# Altium PCB CZ100_V1.0.PcbDoc
Units mm, origin at the board's own origin, x right, y up, seen from the top; angles counter-clockwise.
Board outline 41.8 x 54 mm, 2 copper layers (Top Layer, Bottom Layer); 35 components, 22 nets, 86 pads, 5 vias.
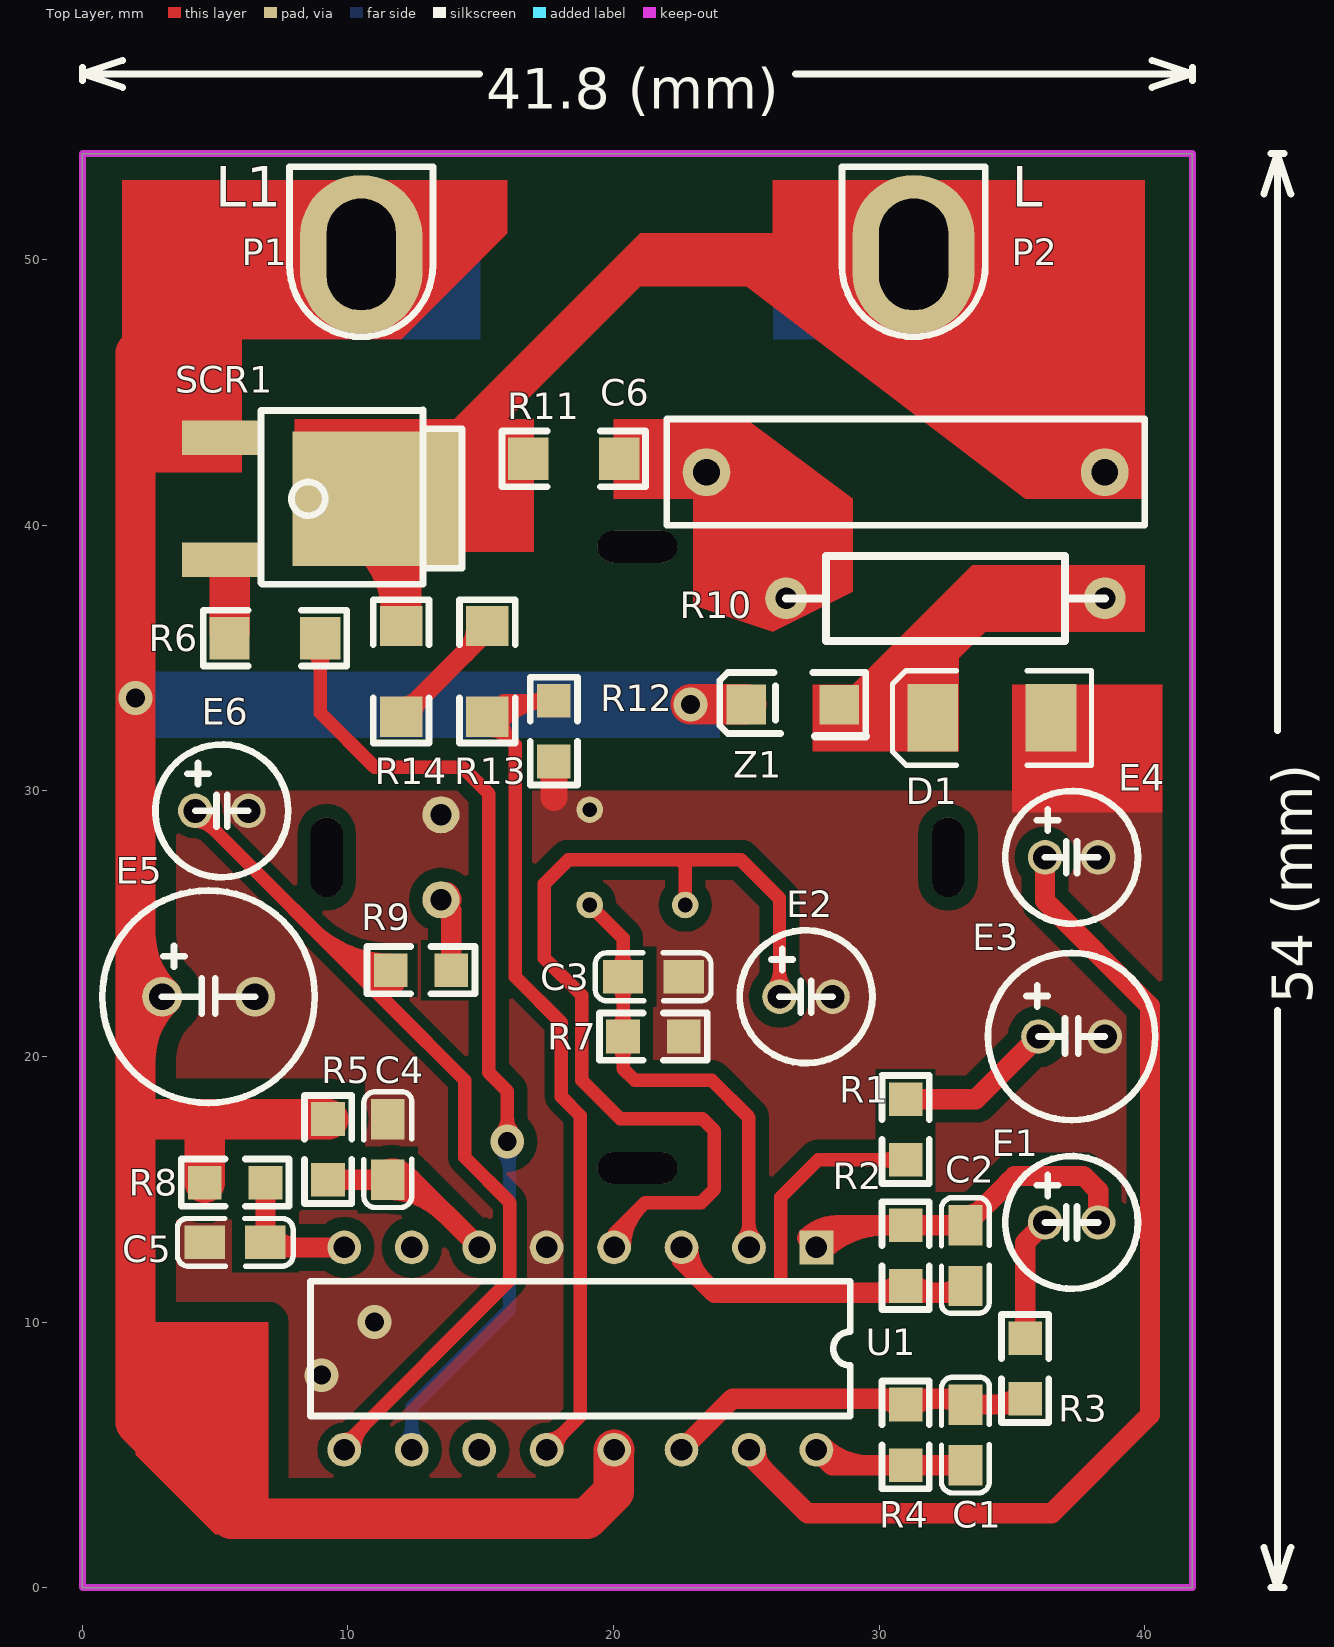
[diagram p0: Top Layer view]
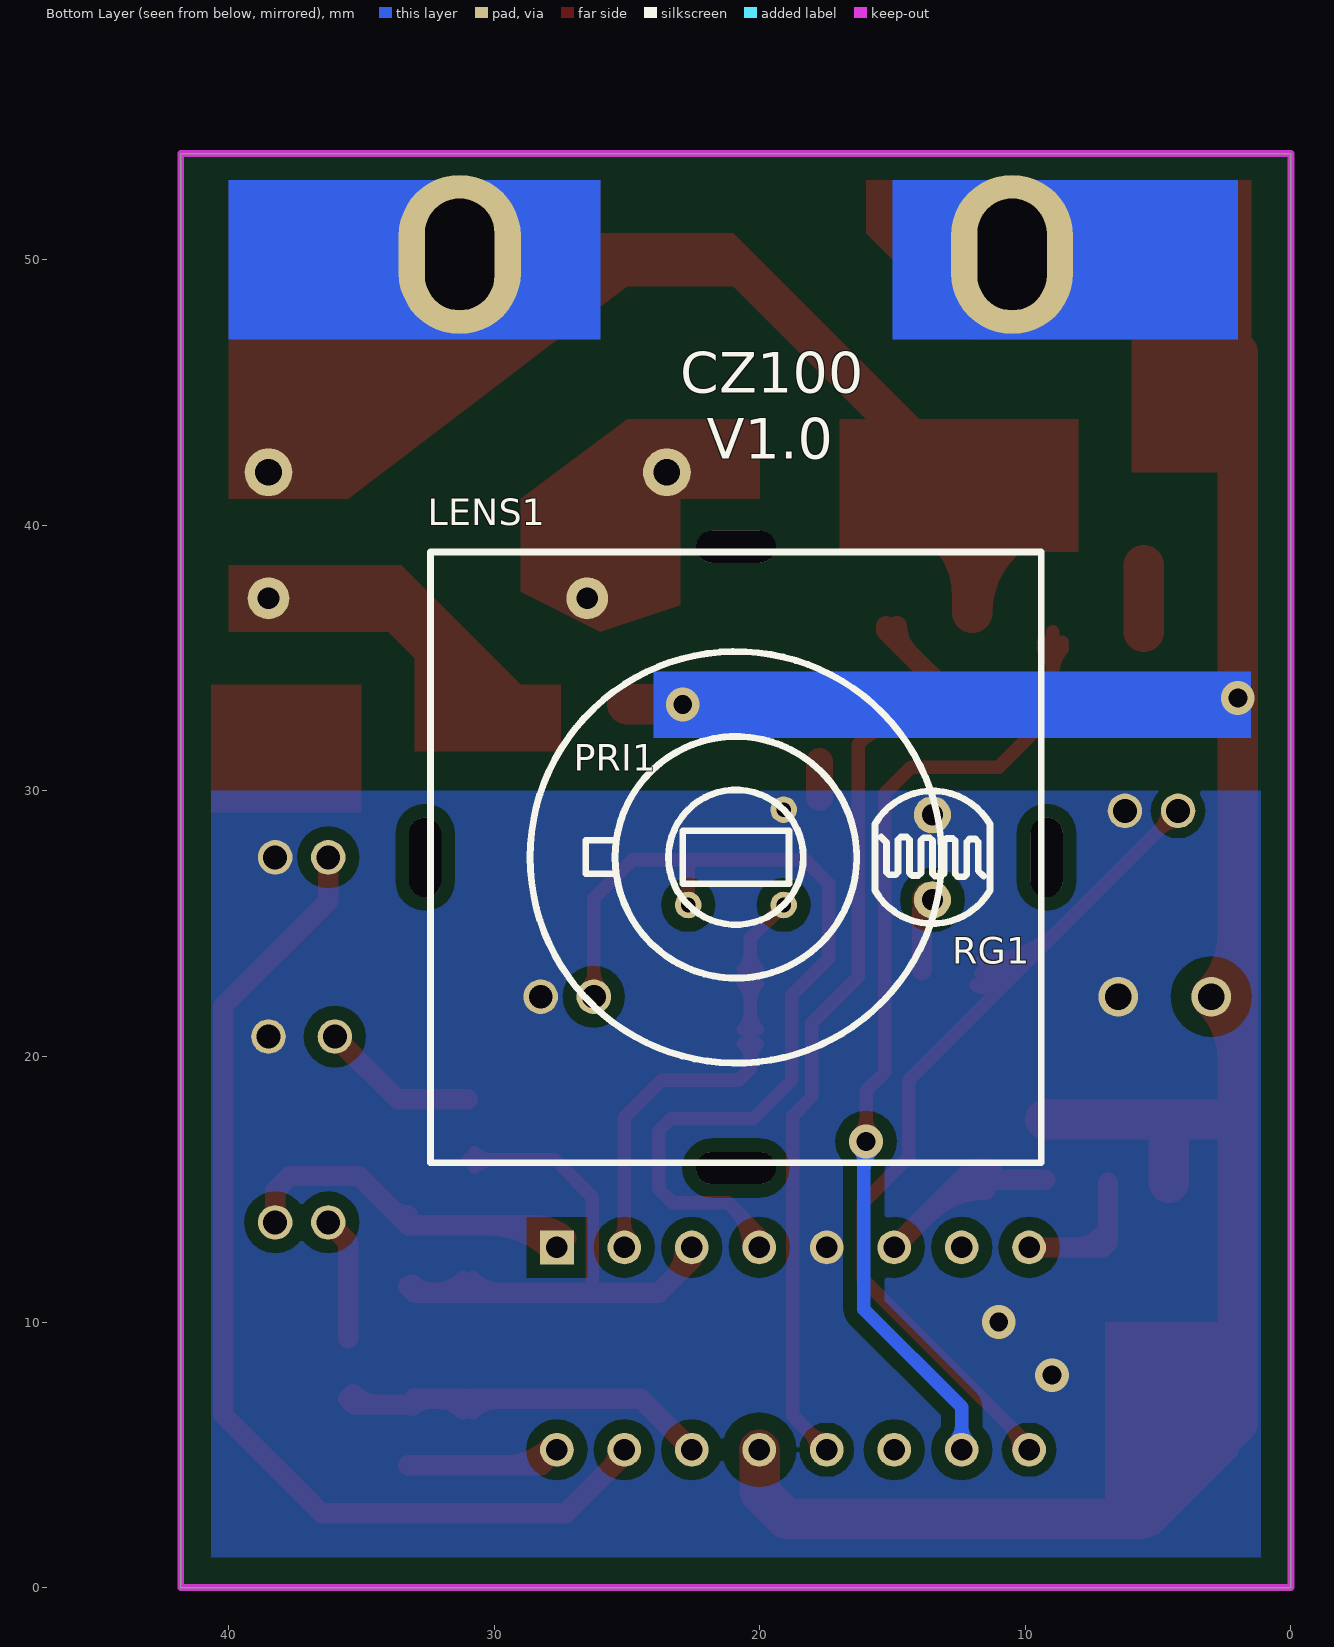
[diagram p1: Bottom Layer view, seen from below]

## Layer stack, top to bottom
Top Layer: signal copper 0.0356
Dielectric: dielectric 0.32, FR-4, Dk 4.8
Bottom Layer: signal copper 0.0356

## Board outline
0,0 0,54 41.8,54 41.8,0

## Design rules (kind name [scope] priority, off if disabled: settings)
Clearance "InPolygon to Keep-Out Layer" [InPolygon vs OnLayer('Keep-Out Layer')] p1: gap=1
Clearance "GND to +5V" [InNet('GND') vs InNet('+5V')] p2: gap=0.762
Clearance "NetE6_1 to GND" [InNet('NetE6_1') vs InNet('GND')] p3: gap=0.381
Clearance "NetR12_1 to GND" [InNet('NetR12_1') vs InNet('GND')] p4: gap=0.381
Clearance "GND to All" [InNet('GND')] p5: gap=0.508
Clearance [All] p6: gap=0.254
HoleSize [All] p1: absolutevalues=TRUE maxlimit=25.4 minlimit=0.025 maxpercent=80.000 minpercent=20.000
MinimumSolderMaskSliver [All] p1: minsoldermaskwidth=0
PlaneConnect [All] p1: planeconnectstyle=Direct reliefexpansion=0.508 reliefentries=4 reliefconductorwidth=0.254 reliefairgap=0.254
PolygonConnect [All] p1: connectstyle=Direct reliefconductorwidth=0.254 reliefentries=4 polygonreliefangle="90 Angle"
RoutingVias [All] p1: holewidth=0.711 width=1.27 viastyle="Through Hole" minholewidth=0.711 minwidth=1.27 maxholewidth=0.711 maxwidth=1.27
SilkToSilkClearance [All] p1: silktosilkclearance=0
SilkscreenOverComponentPads [All] p1: minsilkscreentomaskgap=0
SolderMaskExpansion [All] p1: expansion=0.102
Width [All] p1: maxlimit=25.4 minlimit=0.254 preferedwidth=0.254
23 further rules are at their usual default settings.

## Components (designator, comment, footprint, x,y, rotation, side; value= is the part's Value field where it differs from the comment)
C1 "100nF" 0805_C1 33.25,5.75 r90 top
C2 "270nF" 0805_C1 33.25,12.5 r270 top
C3 "220pF" 0805_C1 21.5,23 r0 top
C4 "220pF" 0805_C1 11.5,16.5 r90 top
C5 "10nF" 0805_C1 5.75,13 r180 top
C6 "CBB22224J400V" CBB22224J400V 31,42 r180 top
D1 "M7" DO-214AC(SMA) 34.25,32.75 r0 top
E1 "47uF/16V" CS_47uF/25V 37.25,13.75 r0 top
E2 "100uF/16V" CS_100uF/16V 27.25,22.25 r0 top
E3 "220uF/16V" CS_220uF/16V 37.25,20.75 r0 top
E4 "22uF/16V" CS_47uF/25V 37.25,27.5 r0 top
E5 "470uF/16V" CS_470uF/16V 4.75,22.25 r0 top
E6 "1uF/50V" CS_47uF/25V 5.25,29.25 r0 top
LENS1 "Fresnel lens" "Fresnel lens" 20.9,27.5 r180 bottom locked
P1 "L1" CP3M*8.8 10.5,53.5 r180 top locked
P2 "L" CP3M*8.8 31.3,53.5 r180 top locked
PRI1 "KP500BP" D203S 20.9,27.5 r315 bottom locked
R1 "2.2K" 0805_R 31,17.25 r270 top
R2 "220K" 0805_R 31,12.5 r90 top
R3 "6.2K" 0805_R 35.5,8.25 r90 top
R4 "430K" 0805_R 31,5.75 r270 top
R5 "510K" 0805_R 9.25,16.5 r90 top
R6 "330R" 1206_R 7.25,35.75 r180 top
R7 "47K" 0805_R 21.5,20.75 r180 top
R8 "30K" 0805_R 5.75,15.25 r180 top
R9 "220K" 0805_R 12.75,23.25 r180 top
R10 "47R/0.5W" RT50 32.5,37.25 r180 top
R11 "1M" 1206_R 18.5,42.5 r0 top
R12 "1M" 0805_R 17.75,32.25 r270 top
R13 "430K" 1206_R 15.25,34.5 r270 top
R14 "430K" 1206_R 12,34.5 r90 top
RG1 "GL5539" R5537 13.5,27.5 r270 bottom locked
SCR1 "BT136" TO-252 8.5,41 r270 top
U1 "CS9803GP" DIP-16 18.75,9 r270 top
Z1 "ZMM5V6" LL-34 26.75,33.25 r0 top

## Footprints (in the part's own frame and the unit in brackets; to place one, negate y for a bottom-side part, rotate by r counter-clockwise, add the part's x,y. Pads: shape width x height; smd on the part's side, far side on the other; paste and mask are expansions set on the pad)
0805_C1 [mil]
  rect 60x50 smd: 1(-45,0) 2(45,0)
  silkscreen extent -86,-35 85,35
0805_R [mil] "SMD Resistor"
  rect 50x50 smd: 1(-45,0) 2(45,0)
  silkscreen extent -80,-35 80,35
1206_R [mm] "SMD Resistor"
  rect 1.52x1.6 smd: 1(-1.71,0) 2(1.71,0)
  silkscreen extent -2.7,-1.05 2.7,1.05
CBB22224J400V [mm]
  round 1.8 hole 1: 1(-7.5,0) 2(7.5,0)
  silkscreen extent -9,-2 9,2
CP3M*8.8 [mm]
  oval 4.6x6 hole 2.6 slot 4.2 at 90 deg: 1(0,3.3)
  silkscreen extent -2.7,0 2.7,6.4
CS_47uF/25V [mm] "PTH  Electrolytic  Capacitor"
  round 1.3 hole 0.9: 1(-1,0) 2(1,0)
  silkscreen extent -2.5,-2.5 2.5,2.5
CS_100uF/16V [mm] "PTH  Electrolytic  Capacitor"
  round 1.3 hole 0.9: 1(-1,0) 2(1,0)
  silkscreen extent -2.5,-2.5 2.5,2.5
CS_220uF/16V [mm] "PTH  Electrolytic  Capacitor"
  round 1.3 hole 0.9: 1(-1.25,0) 2(1.25,0)
  silkscreen extent -3.15,-3.15 3.15,3.15
CS_470uF/16V [mm] "PTH  Electrolytic  Capacitor"
  round 1.5 hole 1: 1(-1.75,0) 2(1.75,0)
  silkscreen extent -4,-4 4,4
D203S [mm] "D203S, KP500BP"
  round 1 hole 0.55: 1(2.54,0) 2(0,2.54) 3(-2.54,0)
  silkscreen extent -4.55,-4.55 4.55,4.55
DIP-16 [mil]
  rect 50x50 hole 32: 1(-150,350)
  round 50 hole 32: 2(-150,250) 3(-150,150) 4(-150,50) 5(-150,-50) 6(-150,-150) 7(-150,-250) 8(-150,-350) 9(150,-350) 10(150,-250) 11(150,-150) 12(150,-50) 13(150,50) 14(150,150) 15(150,250) 16(150,350)
  silkscreen extent -100,-400 100,400
DO-214AC(SMA) [mil] "SMD Diode"
  rect 75x100 smd: A(87.5,0) K(-87.5,0)
  silkscreen extent -147,-70 148,70
"Fresnel lens" [mm]
  oval 1.2x3 hole 1.2 slot 3 at 90 deg unplated: 0(-11.7,0) 0(11.7,0)
  oval 3x1.2 hole 1.2 slot 3 at 0 deg unplated: 0(0,-11.7) 0(0,11.7)
  silkscreen extent -11.5,-11.5 11.5,11.5
LL-34 [mm] "SMD Diode"
  rect 1.5x1.5 smd: A(1.75,-0.008) K(-1.75,0.008)
  silkscreen extent -2.75,-1.19 2.75,1.21
R5537 [mm] "PTH Light dependent resistors"
  round 1.4 hole 0.8: 1(-1.6,0) 2(1.6,0)
  silkscreen extent -2.5,-2.17 2.5,2.17
RT50 [mil]
  round 62 hole 32: 1(-236.22,0) 2(236.22,0)
  silkscreen extent -236,-63 236,63
TO-252 [mm] "SMD IC"
  rect 1.3x3 smd: 1(-2.3,-3.245) 3(2.3,-3.245)
  rect 5.08x6.35 smd: 2(0,2.592)
  silkscreen extent -3.35,-1.78 3.22,5.79

## Part data
C1 C2 C3 C4 C5 C6: library part Cap1
D1: library part Diode-A, "SS14,SS24,SS34,M7"
E1 E2 E3 E4 E5 E6: library part "Cap Pol1"
P1 P2: library part "Header 1", "Header, 1-Pin"
PRI1: library part D203S, "D203S, KP500BP"
R1 R2 R3 R4 R5 R6 R7 R8 R9 R10 R11 R12 R13 R14: library part Res1
SCR1: library part TRIAC
Z1: library part Diode-B

## Via types
v1: diameter 1.27, hole 0.711, Top Layer to Bottom Layer, 5 vias

## Nets (pads, with @x,y where several pads share a name; then routed paths per layer and width w, separated by ;. In a path a pad name is that pad's centre, name@x,y a point inside that pad or via, vN(x,y) a via of type N, cw(c..) or ccw(c..) an arc to the next point about the centre after c; other vN are vias at no path point)
+3.1V_VREF: E2.1 PRI1.1 U1.4 | length 51.9
  Top Layer w0.508: U1.4 20.02,13.32 21.2,14.5 23.3,14.5 23.8,15 23.8,17.2 23.35,17.65 20.25,17.65 18.8,19.1 18.8,22.3 17.4,23.7 17.4,26.5 18.3,27.4 22.5,27.4 ; PRI1.1 22.696,27.204 22.5,27.4 ; E2.1 26.25,23.9 26.25,25.95 24.8,27.4 22.5,27.4 ; U1.4@19.893,12.81 cw(c20.818,12.81) 20.164,13.464 ; U1.4@19.893,12.81 cw(c20.818,12.81) 20.164,13.464 ; U1.4@19.893,12.81 cw(c20.818,12.81) 20.164,13.464 ; U1.4@19.893,12.81 cw(c20.818,12.81) 20.164,13.464 ; U1.4@20.401,12.81 cw(c22.552,12.81) 21.031,14.331 ; U1.4@20.401,12.81 cw(c22.552,12.81) 21.031,14.331 ; U1.4@20.401,12.81 cw(c22.552,12.81) 21.031,14.331 ; U1.4@20.401,12.81 cw(c22.552,12.81) 21.031,14.331 ; E2.1@25.97,22.53 ccw(c25.294,23.206) 26.25,23.206 ; E2.1@25.97,22.53 ccw(c25.294,23.206) 26.25,23.206 ; E2.1@25.97,22.53 ccw(c25.294,23.206) 26.25,23.206 ; E2.1@25.97,22.53 ccw(c25.294,23.206) 26.25,23.206 ; 26.25,23.206 ccw(c27.206,23.206) E2.1@26.53,22.53 ; 26.25,23.206 ccw(c27.206,23.206) E2.1@26.53,22.53 ; 26.25,23.206 ccw(c27.206,23.206) E2.1@26.53,22.53 ; 26.25,23.206 ccw(c27.206,23.206) E2.1@26.53,22.53
+5V: E5.1 P1.1 R5.2 R8.2 SCR1.1 U1.13 Z1.K | length 116.9
  Top Layer w1.524: 2.743,17.643 4.5,17.643 ; R8.2 4.607,17.536 4.5,17.643 ; R5.2 4.5,17.643 ; P1.1 5.7,50.2 2,46.5 2,6.2 5.6,2.6 19,2.6 20,3.6 20,5.17 U1.13 ; v1(22.9,33.258) Z1.K ; 2,19.865 cw(c5.385,19.865) E5.1@2.992,22.258 ; 2,19.865 cw(c5.385,19.865) E5.1@2.992,22.258 ; 2,19.865 cw(c5.385,19.865) E5.1@2.992,22.258 ; 2,19.865 cw(c5.385,19.865) E5.1@2.992,22.258 ; 2,24.635 ccw(c5.385,24.635) E5.1@2.992,22.242 ; 2,24.635 ccw(c5.385,24.635) E5.1@2.992,22.242 ; 2,24.635 ccw(c5.385,24.635) E5.1@2.992,22.242 ; 2,24.635 ccw(c5.385,24.635) E5.1@2.992,22.242 ; P1.1@8.477,50.2 cw(c8.477,48.177) P1.1@9.907,49.607 ; P1.1@8.477,50.2 ccw(c8.477,52.223) P1.1@9.907,50.793 ; P1.1@8.477,50.2 cw(c8.477,48.177) P1.1@9.907,49.607 ; P1.1@8.477,50.2 ccw(c8.477,52.223) P1.1@9.907,50.793 ; P1.1@8.477,50.2 cw(c8.477,48.177) P1.1@9.907,49.607 ; P1.1@8.477,50.2 ccw(c8.477,52.223) P1.1@9.907,50.793 ; P1.1@8.477,50.2 cw(c8.477,48.177) P1.1@9.907,49.607 ; P1.1@8.477,50.2 ccw(c8.477,52.223) P1.1@9.907,50.793
  other v1: 2,33.5
GND: C3.2 C4.2 C5.2 D1.A E2.2 E3.2 E4.2 E5.2 E6.2 PRI1.3 R7.1 R12.2 RG1.1 U1.5 | length 1.4
  Top Layer w1.016: 17.75,29.75 R12.2
  other v1: 9,8 11,10
NetC1_1: C1.1 R4.2 U1.16 | length 14
  Top Layer w0.762: U1.16 28.223,4.607 R4.2 C1.1 ; U1.16@27.82,5.37 ccw(c29.661,7.211) 29.661,4.607 ; U1.16@27.82,5.37 ccw(c29.661,7.211) 29.661,4.607 ; U1.16@27.82,5.37 ccw(c29.661,7.211) 29.661,4.607 ; U1.16@27.82,5.37 ccw(c29.661,7.211) 29.661,4.607
NetC1_2: C1.2 R3.1 R4.1 U1.14 | length 29.4
  Top Layer w0.762: U1.14 24.477,7.107 R4.1@31,7.107 ; R4.1 R4.1@31.107,7 ; R4.1@31.214,7.107 33.036,7.107 C1.2 35.286,6.893 R3.1 ; 29.87,7.107 cw(c29.87,5.763) R4.1@30.82,6.713 ; 29.87,7.107 cw(c29.87,5.763) R4.1@30.82,6.713 ; 29.87,7.107 cw(c29.87,5.763) R4.1@30.82,6.713 ; 29.87,7.107 cw(c29.87,5.763) R4.1@30.82,6.713 ; R4.1@31.18,6.713 cw(c32.13,5.763) 32.13,7.107 ; R4.1@31.18,6.713 cw(c32.13,5.763) 32.13,7.107 ; R4.1@31.18,6.713 cw(c32.13,5.763) 32.13,7.107 ; R4.1@31.18,6.713 cw(c32.13,5.763) 32.13,7.107 ; 32.427,7.107 cw(c32.427,6.197) C1.2@33.07,6.84 ; 32.427,7.107 cw(c32.427,6.197) C1.2@33.07,6.84 ; 32.427,7.107 cw(c32.427,6.197) C1.2@33.07,6.84 ; 32.427,7.107 cw(c32.427,6.197) C1.2@33.07,6.84 ; 34.37,6.893 ccw(c34.37,8.237) R3.1@35.32,7.287 ; 34.37,6.893 ccw(c34.37,8.237) R3.1@35.32,7.287 ; 34.37,6.893 ccw(c34.37,8.237) R3.1@35.32,7.287 ; 34.37,6.893 ccw(c34.37,8.237) R3.1@35.32,7.287
NetC2_1: C2.1 E1.2 R2.2 U1.1 | length 32
  Top Layer w0.762: U1.1 28.473,13.643 R2.2 C2.1 34.8,15.193 34.8,15.2 35.1,15.5 37.7,15.5 38.25,14.95 E1.2 ; U1.1@27.281,13.169 cw(c28.425,12.025) 28.425,13.643 ; U1.1@27.281,13.169 cw(c28.425,12.025) 28.425,13.643 ; U1.1@27.281,13.169 cw(c28.425,12.025) 28.425,13.643 ; U1.1@27.281,13.169 cw(c28.425,12.025) 28.425,13.643 ; U1.1@27.82,12.63 cw(c30.264,10.186) 30.264,13.643 ; U1.1@27.82,12.63 cw(c30.264,10.186) 30.264,13.643 ; U1.1@27.82,12.63 cw(c30.264,10.186) 30.264,13.643 ; U1.1@27.82,12.63 cw(c30.264,10.186) 30.264,13.643 ; C2.1@33.25,14.024 ccw(c33.25,14.944) 33.9,14.293 ; C2.1@33.25,14.024 ccw(c33.25,14.944) 33.9,14.293 ; C2.1@33.25,14.024 ccw(c33.25,14.944) 33.9,14.293 ; C2.1@33.25,14.024 ccw(c33.25,14.944) 33.9,14.293
NetC2_2: C2.2 R1.2 R2.1 U1.3 | length 44.6
  Top Layer w0.508: 26.3,11.1 26.3,14.7 27.707,16.107 R1.2 ; 30.08,16.107 cw(c30.08,15.187) R1.2@30.731,15.838 ; 30.08,16.107 ccw(c30.08,17.027) R1.2@30.731,16.376 ; 30.08,16.107 cw(c30.08,15.187) R1.2@30.731,15.838 ; 30.08,16.107 ccw(c30.08,17.027) R1.2@30.731,16.376 ; 30.08,16.107 cw(c30.08,15.187) R1.2@30.731,15.838 ; 30.08,16.107 ccw(c30.08,17.027) R1.2@30.731,16.376 ; 30.08,16.107 cw(c30.08,15.187) R1.2@30.731,15.838 ; 30.08,16.107 ccw(c30.08,17.027) R1.2@30.731,16.376
  Top Layer w0.762: U1.3 22.56,12.34 23.8,11.1 26.3,11.1 32.993,11.1 C2.2 ; U1.3@22.814,12.81 ccw(c24.562,12.81) 23.326,11.574 ; U1.3@22.814,12.81 ccw(c24.562,12.81) 23.326,11.574 ; U1.3@22.814,12.81 ccw(c24.562,12.81) 23.326,11.574 ; U1.3@22.814,12.81 ccw(c24.562,12.81) 23.326,11.574 ; 29.766,11.1 ccw(c29.766,12.591) R2.1@30.82,11.537 ; 29.766,11.1 ccw(c29.766,12.591) R2.1@30.82,11.537 ; 29.766,11.1 ccw(c29.766,12.591) R2.1@30.82,11.537 ; 29.766,11.1 ccw(c29.766,12.591) R2.1@30.82,11.537 ; R2.1@31.18,11.537 ccw(c32.234,12.591) 32.234,11.1 ; R2.1@31.18,11.537 ccw(c32.234,12.591) 32.234,11.1 ; R2.1@31.18,11.537 ccw(c32.234,12.591) 32.234,11.1 ; R2.1@31.18,11.537 ccw(c32.234,12.591) 32.234,11.1 ; 32.323,11.1 ccw(c32.323,12.157) C2.2@33.07,11.41 ; 32.323,11.1 ccw(c32.323,12.157) C2.2@33.07,11.41 ; 32.323,11.1 ccw(c32.323,12.157) C2.2@33.07,11.41 ; 32.323,11.1 ccw(c32.323,12.157) C2.2@33.07,11.41
NetC3_1: C3.1 PRI1.2 R7.2 U1.2 | length 46
  Top Layer w0.508: PRI1.2 20.357,24.451 C3.1 R7.2 20.357,19.543 20.8,19.1 23.7,19.1 25.1,17.7 U1.2 ; R7.2@20.088,20.481 cw(c19.437,19.83) 20.357,19.83 ; R7.2@20.088,20.481 cw(c19.437,19.83) 20.357,19.83 ; R7.2@20.088,20.481 cw(c19.437,19.83) 20.357,19.83 ; R7.2@20.088,20.481 cw(c19.437,19.83) 20.357,19.83 ; R7.2@20.088,21.019 ccw(c19.437,21.67) 20.357,21.67 ; R7.2@20.088,21.019 ccw(c19.437,21.67) 20.357,21.67 ; R7.2@20.088,21.019 ccw(c19.437,21.67) 20.357,21.67 ; R7.2@20.088,21.019 ccw(c19.437,21.67) 20.357,21.67 ; C3.1@20.088,22.731 cw(c19.437,22.08) 20.357,22.08 ; C3.1@20.088,22.731 cw(c19.437,22.08) 20.357,22.08 ; C3.1@20.088,22.731 cw(c19.437,22.08) 20.357,22.08 ; C3.1@20.088,22.731 cw(c19.437,22.08) 20.357,22.08 ; C3.1@20.088,23.269 ccw(c19.437,23.92) 20.357,23.92 ; C3.1@20.088,23.269 ccw(c19.437,23.92) 20.357,23.92 ; C3.1@20.088,23.269 ccw(c19.437,23.92) 20.357,23.92 ; C3.1@20.088,23.269 ccw(c19.437,23.92) 20.357,23.92 ; 20.357,19.83 cw(c21.277,19.83) R7.2@20.626,20.481 ; 20.357,19.83 cw(c21.277,19.83) R7.2@20.626,20.481 ; 20.357,19.83 cw(c21.277,19.83) R7.2@20.626,20.481 ; 20.357,19.83 cw(c21.277,19.83) R7.2@20.626,20.481 ; 20.357,21.67 ccw(c21.277,21.67) R7.2@20.626,21.019 ; 20.357,21.67 ccw(c21.277,21.67) R7.2@20.626,21.019 ; 20.357,21.67 ccw(c21.277,21.67) R7.2@20.626,21.019 ; 20.357,21.67 ccw(c21.277,21.67) R7.2@20.626,21.019 ; 20.357,22.08 cw(c21.277,22.08) C3.1@20.626,22.731 ; 20.357,22.08 cw(c21.277,22.08) C3.1@20.626,22.731 ; 20.357,22.08 cw(c21.277,22.08) C3.1@20.626,22.731 ; 20.357,22.08 cw(c21.277,22.08) C3.1@20.626,22.731 ; 20.357,23.92 ccw(c21.277,23.92) C3.1@20.626,23.269 ; 20.357,23.92 ccw(c21.277,23.92) C3.1@20.626,23.269 ; 20.357,23.92 ccw(c21.277,23.92) C3.1@20.626,23.269 ; 20.357,23.92 ccw(c21.277,23.92) C3.1@20.626,23.269 ; U1.2@24.831,13.079 ccw(c24.18,13.73) 25.1,13.73 ; U1.2@24.831,13.079 ccw(c24.18,13.73) 25.1,13.73 ; U1.2@24.831,13.079 ccw(c24.18,13.73) 25.1,13.73 ; U1.2@24.831,13.079 ccw(c24.18,13.73) 25.1,13.73 ; 25.1,13.73 ccw(c26.02,13.73) U1.2@25.369,13.079 ; 25.1,13.73 ccw(c26.02,13.73) U1.2@25.369,13.079 ; 25.1,13.73 ccw(c26.02,13.73) U1.2@25.369,13.079 ; 25.1,13.73 ccw(c26.02,13.73) U1.2@25.369,13.079
NetC4_1: C4.1 R5.1 U1.6 | length 30
  Top Layer w0.762: R5.1 C4.1 12.393,15.357 U1.6 ; C4.1@11.243,15.668 cw(c11.644,14.984) 12.205,15.545 ; C4.1@11.243,15.668 cw(c11.644,14.984) 12.205,15.545 ; C4.1@11.243,15.668 cw(c11.644,14.984) 12.205,15.545 ; C4.1@11.243,15.668 cw(c11.644,14.984) 12.205,15.545 ; C4.1@11.5,14.976 cw(c11.5,11.9) 13.675,14.075 ; C4.1@11.5,14.976 cw(c11.5,11.9) 13.675,14.075 ; C4.1@11.5,14.976 cw(c11.5,11.9) 13.675,14.075 ; C4.1@11.5,14.976 cw(c11.5,11.9) 13.675,14.075 ; C4.1@11.5,15.738 cw(c11.5,14.502) 12.374,15.376 ; C4.1@11.5,15.738 cw(c11.5,14.502) 12.374,15.376 ; C4.1@11.5,15.738 cw(c11.5,14.502) 12.374,15.376 ; C4.1@11.5,15.738 cw(c11.5,14.502) 12.374,15.376 ; C4.1@11.628,15.011 cw(c12.16,14.104) 12.903,14.847 ; C4.1@11.628,15.011 cw(c12.16,14.104) 12.903,14.847 ; C4.1@11.628,15.011 cw(c12.16,14.104) 12.903,14.847 ; C4.1@11.628,15.011 cw(c12.16,14.104) 12.903,14.847
NetC5_1: C5.1 R8.1 U1.8 | length 9.3
  Top Layer w0.762: R8.1 C5.1 7.083,12.81 U1.8 ; C5.1@7.2,13.18 ccw(c8.092,14.072) 8.092,12.81 ; C5.1@7.2,13.18 ccw(c8.092,14.072) 8.092,12.81 ; C5.1@7.2,13.18 ccw(c8.092,14.072) 8.092,12.81 ; C5.1@7.2,13.18 ccw(c8.092,14.072) 8.092,12.81
NetC6_1: C6.1 P2.1 R11.1 R14.2 SCR1.2 | length 101.1
  Top Layer w1.524: R14.2@12,36.71 12,40.842 11.092,41.75 SCR1.2@13.05,41.75 ; 21.5,50.2 32.3,50.2 38.5,44 ; P2.1@29.277,50.2 cw(c29.277,48.177) P2.1@30.707,49.607 ; P2.1@29.277,50.2 ccw(c29.277,52.223) P2.1@30.707,50.793 ; P2.1@29.277,50.2 cw(c29.277,48.177) P2.1@30.707,49.607 ; P2.1@29.277,50.2 ccw(c29.277,52.223) P2.1@30.707,50.793 ; P2.1@29.277,50.2 cw(c29.277,48.177) P2.1@30.707,49.607 ; P2.1@29.277,50.2 ccw(c29.277,52.223) P2.1@30.707,50.793 ; P2.1@29.277,50.2 cw(c29.277,48.177) P2.1@30.707,49.607 ; P2.1@29.277,50.2 ccw(c29.277,52.223) P2.1@30.707,50.793 ; P2.1@31.3,48.462 cw(c31.3,41.852) 35.974,46.526 ; P2.1@31.3,48.462 cw(c31.3,41.852) 35.974,46.526 ; P2.1@31.3,48.462 cw(c31.3,41.852) 35.974,46.526 ; P2.1@31.3,48.462 cw(c31.3,41.852) 35.974,46.526 ; P2.1@31.3,49.986 cw(c31.3,47.055) P2.1@33.372,49.128 ; P2.1@31.3,49.986 cw(c31.3,47.055) P2.1@33.372,49.128 ; P2.1@31.3,49.986 cw(c31.3,47.055) P2.1@33.372,49.128 ; P2.1@31.3,49.986 cw(c31.3,47.055) P2.1@33.372,49.128 ; SCR1.2@10.47,40.493 cw(c6.775,36.798) 12,36.798 ccw(c6.775,36.798) SCR1.2@10.47,40.493 ; SCR1.2@10.608,39.618 cw(c8.248,36.702) 12,36.702 ccw(c8.248,36.702) SCR1.2@10.608,39.618 ; SCR1.2@11.727,42.004 ccw(c11.727,45.811) 14.419,43.119 cw(c11.727,45.811) SCR1.2@11.727,42.004 ; 12,37.367 cw(c15.36,37.367) 12.984,39.743 ccw(c15.36,37.367) 12,37.367 ; 12,38.117 cw(c15.36,38.117) 12.984,40.493 ccw(c15.36,38.117) 12,38.117
NetC6_2: C6.2 R10.2 R11.2
NetD1_K: D1.K R10.1 Z1.A
NetE1_1: E1.1 R3.2 | length 4.7
  Top Layer w0.762: R3.2 35.5,13 E1.1
NetE3_1: E3.1 R1.1 | length 6
  Top Layer w0.762: R1.1 33.643,18.393 E3.1
NetE4_1: E4.1 U1.15 | length 43.7
  Top Layer w0.762: U1.15 25.1,5 27.3,2.8 36.5,2.8 40.2,6.5 40.2,21.9 36.25,25.85 E4.1 ; U1.15@25.354,5.19 ccw(c26.426,5.19) 25.668,4.432 ; U1.15@25.354,5.19 ccw(c26.426,5.19) 25.668,4.432 ; U1.15@25.354,5.19 ccw(c26.426,5.19) 25.668,4.432 ; U1.15@25.354,5.19 ccw(c26.426,5.19) 25.668,4.432
NetE6_1: E6.1 R9.2 U1.9 | length 91.7
  Top Layer w0.508: E6.1 11.6,21.9 ; U1.9 9.86,5.36 16.1,11.6 16.1,14.5 14.4,16.2 14.4,19.1 11.6,21.9 ; 11.607,21.907 11.6,21.9 ; E6.1@4.25,28.854 cw(c4.25,27.898) 4.926,28.574 ; E6.1@4.25,28.854 cw(c4.25,27.898) 4.926,28.574 ; E6.1@4.25,28.854 cw(c4.25,27.898) 4.926,28.574 ; E6.1@4.25,28.854 cw(c4.25,27.898) 4.926,28.574 ; E6.1@4.646,29.25 ccw(c5.602,29.25) 4.926,28.574 ; E6.1@4.646,29.25 ccw(c5.602,29.25) 4.926,28.574 ; E6.1@4.646,29.25 ccw(c5.602,29.25) 4.926,28.574 ; E6.1@4.646,29.25 ccw(c5.602,29.25) 4.926,28.574 ; 8.64,24.86 ccw(c11.607,27.827) R9.2@11.607,23.631 ; 8.64,24.86 ccw(c11.607,27.827) R9.2@11.607,23.631 ; 8.64,24.86 ccw(c11.607,27.827) R9.2@11.607,23.631 ; 8.64,24.86 ccw(c11.607,27.827) R9.2@11.607,23.631 ; 9.507,23.993 ccw(c11.607,26.092) R9.2@11.607,23.123 ; 9.507,23.993 ccw(c11.607,26.092) R9.2@11.607,23.123 ; 9.507,23.993 ccw(c11.607,26.092) R9.2@11.607,23.123 ; 9.507,23.993 ccw(c11.607,26.092) R9.2@11.607,23.123 ; 9.579,23.921 ccw(c10.744,25.087) R9.2@11.445,23.595 ; 9.579,23.921 ccw(c10.744,25.087) R9.2@11.445,23.595 ; 9.579,23.921 ccw(c10.744,25.087) R9.2@11.445,23.595 ; 9.579,23.921 ccw(c10.744,25.087) R9.2@11.445,23.595 ; U1.9@9.86,5.571 ccw(c9.86,6.08) 10.22,5.72 ; U1.9@9.86,5.571 ccw(c9.86,6.08) 10.22,5.72 ; U1.9@9.86,5.571 ccw(c9.86,6.08) 10.22,5.72 ; U1.9@9.86,5.571 ccw(c9.86,6.08) 10.22,5.72 ; 10.09,23.41 ccw(c11.071,24.391) R9.2@11.661,23.135 ; 10.09,23.41 ccw(c11.071,24.391) R9.2@11.661,23.135 ; 10.09,23.41 ccw(c11.071,24.391) R9.2@11.661,23.135 ; 10.09,23.41 ccw(c11.071,24.391) R9.2@11.661,23.135 ; U1.9@10.241,5.19 cw(c11.571,5.19) 10.631,6.131 ; U1.9@10.241,5.19 cw(c11.571,5.19) 10.631,6.131 ; U1.9@10.241,5.19 cw(c11.571,5.19) 10.631,6.131 ; U1.9@10.241,5.19 cw(c11.571,5.19) 10.631,6.131 ; 10.374,23.126 ccw(c11.607,24.358) R9.2@11.607,22.615 ; 10.374,23.126 ccw(c11.607,24.358) R9.2@11.607,22.615 ; 10.374,23.126 ccw(c11.607,24.358) R9.2@11.607,22.615 ; 10.374,23.126 ccw(c11.607,24.358) R9.2@11.607,22.615 ; 10.602,22.898 ccw(c11.398,23.695) R9.2@11.877,22.675 ; 10.602,22.898 ccw(c11.398,23.695) R9.2@11.877,22.675 ; 10.602,22.898 ccw(c11.398,23.695) R9.2@11.877,22.675 ; 10.602,22.898 ccw(c11.398,23.695) R9.2@11.877,22.675
NetR6_1: R6.1 U1.10 | length 62.2
  Top Layer w0.508: R6.1@8.96,36 8.96,32.94 11,30.9 14.3,30.9 15.3,29.9 15.3,19.4 16,18.7 v1(16,16.8) ; 8.96,34.488 cw(c10.182,34.488) 9.318,35.352 ccw(c10.182,34.488) 8.96,34.488 ; 8.96,34.488 ccw(c7.738,34.488) 8.602,35.352 cw(c7.738,34.488) 8.96,34.488 ; 8.96,34.738 cw(c10.182,34.738) 9.318,35.602 ccw(c10.182,34.738) 8.96,34.738 ; 8.96,34.738 ccw(c7.738,34.738) 8.602,35.602 cw(c7.738,34.738) 8.96,34.738 ; v1@15.731,17.069 ccw(c15.08,17.72) 16,17.72 ; v1@15.731,17.069 ccw(c15.08,17.72) 16,17.72 ; v1@15.731,17.069 ccw(c15.08,17.72) 16,17.72 ; v1@15.731,17.069 ccw(c15.08,17.72) 16,17.72 ; 16,17.72 ccw(c16.92,17.72) v1@16.269,17.069 ; 16,17.72 ccw(c16.92,17.72) v1@16.269,17.069 ; 16,17.72 ccw(c16.92,17.72) v1@16.269,17.069 ; 16,17.72 ccw(c16.92,17.72) v1@16.269,17.069
  Bottom Layer w0.508: U1.10 12.4,6.8 16.083,10.483 16.083,16.717 v1(16,16.8) ; U1.10@12.131,5.459 ccw(c11.48,6.11) 12.4,6.11 ; U1.10@12.131,5.459 ccw(c11.48,6.11) 12.4,6.11 ; U1.10@12.131,5.459 ccw(c11.48,6.11) 12.4,6.11 ; U1.10@12.131,5.459 ccw(c11.48,6.11) 12.4,6.11 ; 12.4,6.11 ccw(c13.32,6.11) U1.10@12.669,5.459 ; 12.4,6.11 ccw(c13.32,6.11) U1.10@12.669,5.459 ; 12.4,6.11 ccw(c13.32,6.11) U1.10@12.669,5.459 ; 12.4,6.11 ccw(c13.32,6.11) U1.10@12.669,5.459 ; v1@15.731,16.531 cw(c14.88,15.68) 16.083,15.68 ; v1@15.731,16.531 cw(c14.88,15.68) 16.083,15.68 ; v1@15.731,16.531 cw(c14.88,15.68) 16.083,15.68 ; v1@15.731,16.531 cw(c14.88,15.68) 16.083,15.68 ; 16.083,16.081 cw(c16.719,16.081) v1@16.269,16.531 ; 16.083,16.081 cw(c16.719,16.081) v1@16.269,16.531 ; 16.083,16.081 cw(c16.719,16.081) v1@16.269,16.531 ; 16.083,16.081 cw(c16.719,16.081) v1@16.269,16.531
NetR6_2: R6.2 SCR1.3 | length 2.5
  Top Layer w1.524: R6.2@5.54,36 SCR1.3@5.54,38.5
NetR9_1: R9.1 RG1.2 | length 4.1
  Top Layer w0.762: RG1.2 13.893,25.507 R9.1 ; RG1.2@13.769,26.169 cw(c13.471,25.871) RG1.2@13.893,25.871 ; RG1.2@13.769,26.169 cw(c13.471,25.871) RG1.2@13.893,25.871 ; RG1.2@13.769,26.169 cw(c13.471,25.871) RG1.2@13.893,25.871 ; RG1.2@13.769,26.169 cw(c13.471,25.871) RG1.2@13.893,25.871
NetR12_1: R12.1 R13.2 U1.12 | length 44.5
  Top Layer w0.508: R13.2 16.3,31.74 16.3,23 18.038,21.262 18.038,18.484 18.75,17.772 18.75,6.46 U1.12 ; R13.2@15.289,32.791 cw(c16.623,31.612) 16.623,33.393 ; R13.2@15.29,32.284 cw(c15.29,31.159) 16.086,31.954 ; R13.2@15.669,32.455 cw(c17.75,30.616) R12.1 R13.2@15.853,33.393 ; R13.2@15.796,32.79 ccw(c17.114,32.79) 16.182,31.858 ; R12.1@17.481,33.124 ccw(c16.83,32.473) 16.83,33.393 ccw(c16.83,34.313) R12.1@17.481,33.662 ; U1.12@17.48,5.571 ccw(c17.48,6.491) 18.13,5.84 ; U1.12@17.48,5.571 ccw(c17.48,6.491) 18.13,5.84 ; U1.12@17.48,5.571 ccw(c17.48,6.491) 18.13,5.84 ; U1.12@17.48,5.571 ccw(c17.48,6.491) 18.13,5.84 ; U1.12@17.861,5.19 cw(c18.781,5.19) 18.13,5.84 ; U1.12@17.861,5.19 cw(c18.781,5.19) 18.13,5.84 ; U1.12@17.861,5.19 cw(c18.781,5.19) 18.13,5.84 ; U1.12@17.861,5.19 cw(c18.781,5.19) 18.13,5.84
NetR13_1: R13.1 R14.1 | length 9.9
  Top Layer w0.762: R14.1 15.25,36.04 R13.1 ; R14.1@12.04,33.169 ccw(c12.04,33.987) 12.619,33.409 cw(c12.04,33.987) R14.1@12.04,33.169 ; R14.1@12.419,32.79 cw(c13.431,32.79) 12.715,33.505 ccw(c13.431,32.79) R14.1@12.419,32.79 ; 14.415,35.205 ccw(c13.409,36.21) 14.831,36.21 cw(c13.409,36.21) 14.415,35.205
pads on no net: LENS1.0 U1.7 U1.11

## Polygon pours and split planes (outlines as drawn)
GND on Top Layer "Top Layer-No Net" (solid, remove dead copper, pour order 1000): 0,1 41.8,1 42,1.2 42,30 0,30 0,1
GND on Bottom Layer "Bot Layer-No Net" (solid, remove dead copper, pour order 1001): 0,1 42,1 42,30 0,30 0,1

## Keep-outs
Keep-Out Layer:
  the board outline again, w0.254

## Other copper
Top Layer:
  rectangle net GND: 35,29.19 40.663,34
  rectangle net NetC6_1: 13,39 17,44
  region net NetD1_K: 27.5,34 27.5,31.5 33,31.5 33,35 34,36 40,36 40,38.5 33.5,38.5 29,34
  region net NetC6_2: 20,44 20,41 23,41 23,37 26,36 29,37.5 29,41 25,44
  region net +5V: 2,10 2,5 5,2 7,2 7,10
  region net +5V: 16,53 16,51 12,47 6,47 6,42 1.5,42 1.5,53
  region net NetC6_1: 40,53 40,41 35.5,41 25,49 21,49 14,42 14,39 8,39 8,44 14,44 21,51 26,51 26,53
Bottom Layer:
  rectangle net +5V: 2,47 15,53
  rectangle net NetC6_1: 26,47 40,53
  rectangle net +5V: 1.5,32 24,34.5

## Silkscreen, mask and mechanical layers (free items; w line width, h text height)
Top Overlay:
  lines w0.254: 0,56.746 0,57.254 ; 1.524,56.492 0,57 ; 1.524,57.508 0,57 ; 14.95,57 0,57 ; 26.85,57 41.8,57 ; 40.276,56.492 41.8,57 ; 40.276,57.508 41.8,57 ; 41.8,56.746 41.8,57.254 ; 44.492,1.524 45,0 ; 44.492,52.476 45,54 ; 44.746,0 45.254,0 ; 44.746,54 45.254,54 ; 45,21.736 45,0 ; 45,32.264 45,54 ; 45.508,1.524 45,0 ; 45.508,52.476 45,54
  text "41.8 (mm)" at 15.204,55.687 h1.52
  text "L1" at 5,52 h1.52
  text "L" at 35,52 h1.52
  text "54 (mm)" at 46.313,21.99 h1.52 r90
Bottom Overlay:
  text "CZ100" at 23,45 h1.52
  text "V1.0" at 22,42.5 h1.52